# Altium PCB OSU_Robotics_Kids.PcbDoc (part 1 of 3)
Units mm, origin at the board's own origin, x right, y up, seen from the top; angles counter-clockwise.
Board outline 80 x 40 mm, 2 copper layers (Top Layer, Bottom Layer); 19 components, 0 nets, 262 pads, 0 vias.
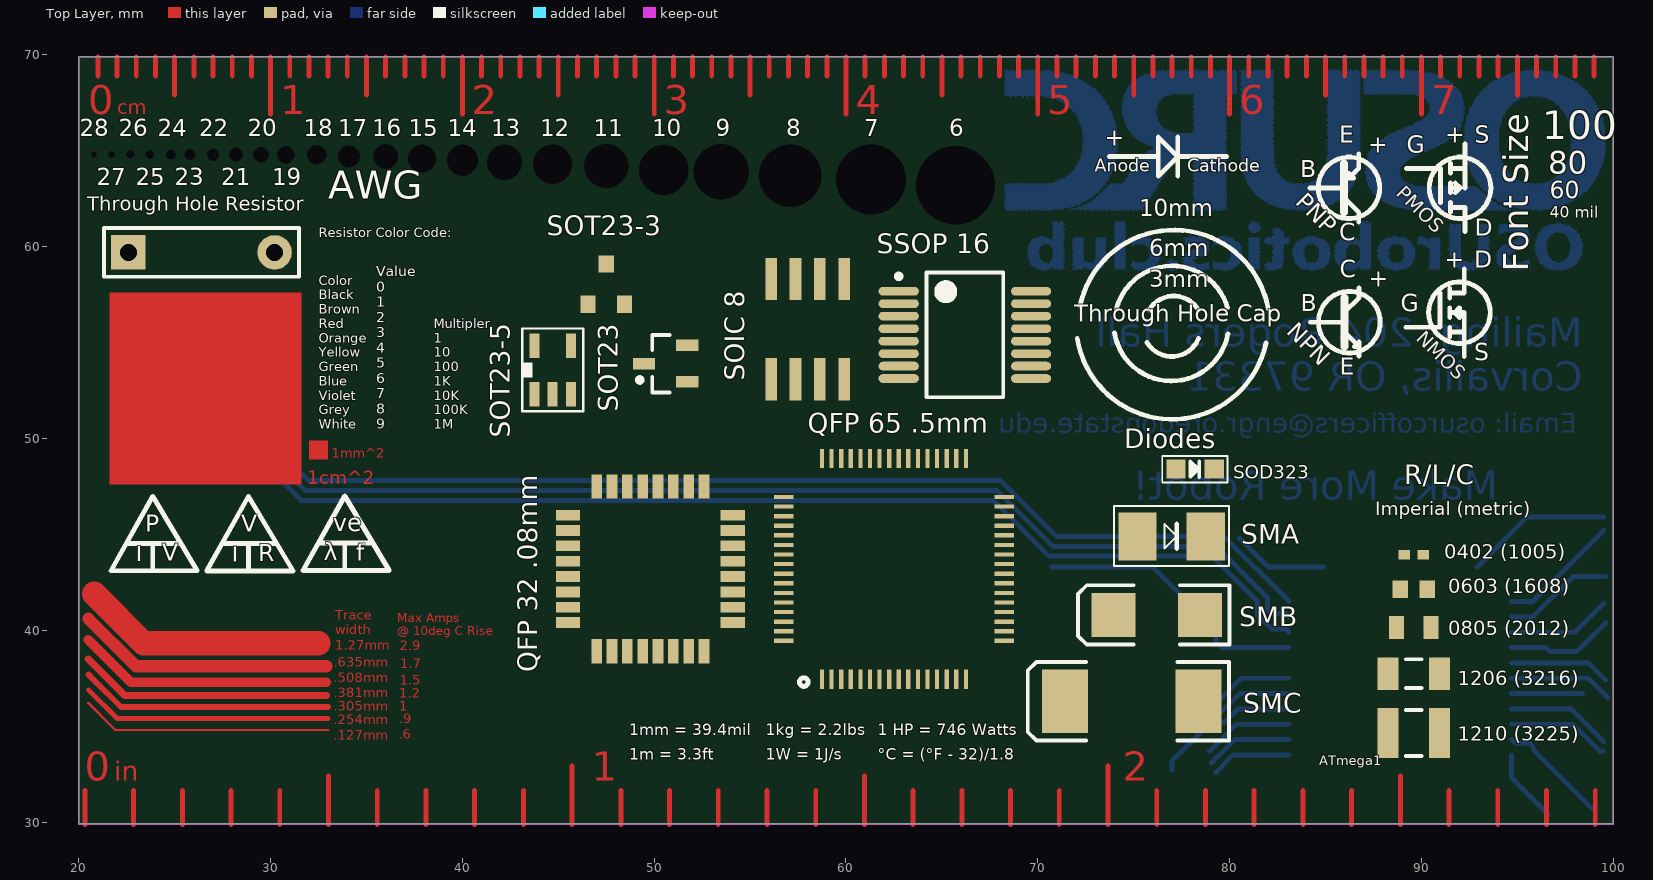
[diagram p0: Top Layer view]
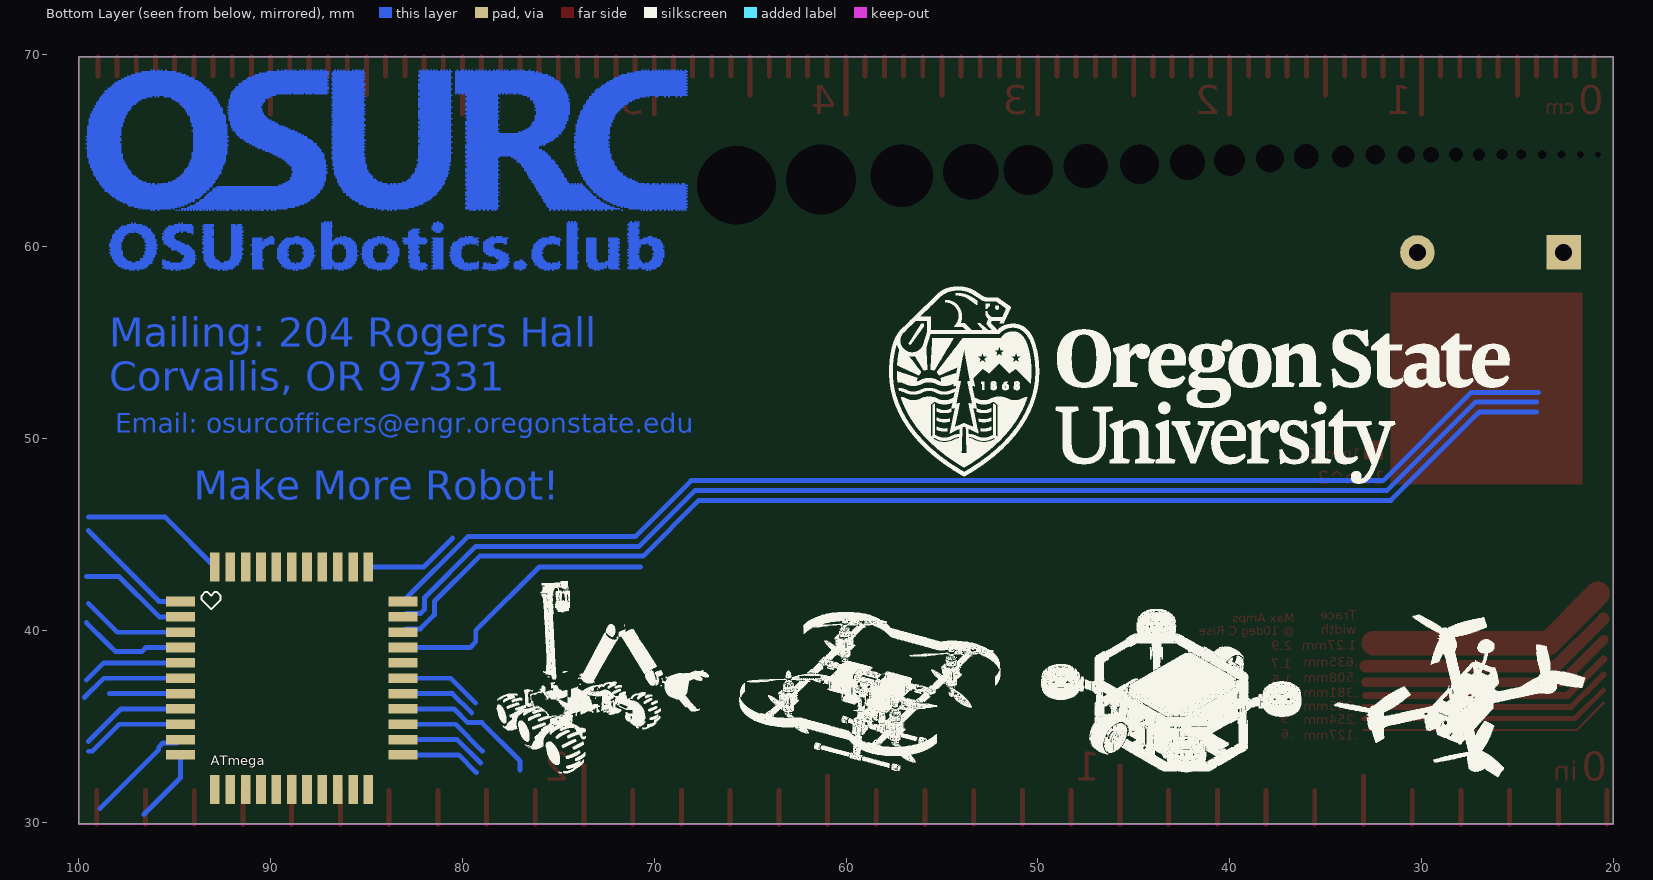
[diagram p1: Bottom Layer view, seen from below]

## Layer stack, top to bottom
Top Solder: solder mask 0.0102, Solder Resist, Dk 3.5
Top Layer: signal copper 0.0356
Dielectric 1: dielectric 0.32, FR-4, Dk 4.8
Bottom Layer: signal copper 0.0356
Bottom Solder: solder mask 0.0102, Solder Resist, Dk 3.5

## Board outline
20,29.9 100,29.9 100,69.9 20,69.9

## Design rules (kind name [scope] priority, off if disabled: settings)
Clearance [All] p1: gap=0.254 ignorepadtopadclearanceinfootprint=FALSE except(0: Arc-Hole Track-Hole SMDPad-Hole THPad-Hole Via-Hole Fill-Hole Poly-Hole Region-Hole Text-Hole)
PolygonConnect [All] p1: connectstyle=Relief reliefconductorwidth=0.254 reliefentries=4 polygonreliefangle="90 Angle" airgapwidth=0.254
RoomDefinition OSU_Robotics_Kids_lights [InComponentClass('OSU_Robotics_Kids_lights')] p1: confinementstyle=ConfineIn formatcopy=TRUE lockcomponents=FALSE outline 20,30 100,30 100,69.9 20,69.9
RoutingVias [All] p1: holewidth=0.711 width=1.27 viastyle="Through Hole" minholewidth=0.711 minwidth=1.27 maxholewidth=0.711 maxwidth=1.27
SolderMaskExpansion [All] p1: expansion=0.102
Width [All] p1: maxlimit=2.54 minlimit=0.076 preferedwidth=0.254
30 further rules are at their usual default settings.

## Classes and differential pairs
component class OSU_Robotics_Kids_lights: "0402 (1005)" "0603 (1608)" "0805 (2012)" "1206 (3216)" "1210 (3225)" ATmega "QFP 32 .08mm" "QFP 65 .5mm" SMA SMB SMC SOD323 "SOIC 8" SOT23 SOT23-3 SOT23-5 "SSOP 16"

## Components (designator, comment, footprint, x,y, rotation, side; value= is the part's Value field where it differs from the comment)
"0402 (1005)" "Cap Semi" 0402 89.6,43.94 r180 top value="0402 (1005)"
"0603 (1608)" "Cap Semi" 1608[0603] 89.6,42.14 r180 top value="0603 (1608)"
"0805 (2012)" "0805 (2012)" 0805 89.6,40.14 r180 top
"1206 (3216)" "Cap Semi" C1206 89.6,37.74 r0 top value="1206 (3216)"
"1210 (3225)" "Cap Semi" C1210 89.6,34.64 r0 top value="1210 (3225)"
ATmega "ATmega" SPARKFUN-DIGITALIC_TQFP44#1 88.9,37.5 r180 bottom
ATmega1 "ATmega" SPARKFUN-DIGITALIC_TQFP44#2 88.9,37.5 r0 top (schematic designator ATmega)
"QFP 32 .08mm" "QFP 32 .08mm" TQFP32-08_MCU 49.8,43.2 r0 top
"QFP 65 .5mm" "QFP 65 .05mm" TQFP64_MCU 62.5,43.2 r0 top
SMA "MBRS140" DIODE-SMA 74.325,44.9 r180 top
SMB "D Schottky" SMB 76.2,40.8 r180 top
SMC "Diode" SMC 74.9,36.3 r180 top
SOD323 "BAT20" SOD323 77.2,48.4 r180 top
"SOIC 8" "SOIC 8" SOIC-8 58,55.7 r0 top
SOT23 "SOT-23" SOT23_N 50.6,53.9 r180 top
SOT23-3 "" SOT23-3 47.5,58 r0 top
SOT23-5 "AD8601" SOT23-5 43.76,52.3 r90 top
"SSOP 16" "SSOP 16" SSOP16_N 66.2,55.4 r0 top value=1K (schematic designator R25)
"Through Hole Resistor" "Comment" PCB-2034311-1 26.4,59.7 r0 top

## Footprints (in the part's own frame and the unit in brackets; to place one, negate y for a bottom-side part, rotate by r counter-clockwise, add the part's x,y. Pads: shape width x height; smd on the part's side, far side on the other; paste and mask are expansions set on the pad)
0402 [mm] "Chip Capacitor, Body 1.0x0.5mm, IPC High Density"
  rect 0.6x0.5 smd: 1(-0.5,0) 2(0.5,0)
  body extent -0.55,-0.3 0.55,0.3, height 1.3
0805 [mil]
  rect 31.5x47.24 smd: 1(-35.43,0) 2(35.43,0)
1608[0603] [mm] "Chip Capacitor, Body 1.6x0.8mm, IPC High Density"
  rect 0.8x0.9 smd: 1(-0.7,0) 2(0.7,0)
  body extent -0.87,-0.48 0.87,0.48, height 1.3
C1206 [mm] "Chip Capacitor, Body 3.2x1.6mm, IPC High Density"
  rect 1.1x1.7 smd: 1(-1.35,0) 2(1.35,0)
  silkscreen extent -0.4,-0.75 0.4,0.75, body extent -1.7,-0.9 1.7,0.9, height 1.3
C1210 [mm] "Chip Capacitor, Body 3.2x2.5mm, IPC High Density"
  rect 1.1x2.6 smd: 1(-1.35,0) 2(1.35,0)
  silkscreen extent -0.4,-1.2 0.4,1.2, body extent -1.7,-1.35 1.7,1.35, height 1.3
DIODE-SMA [mm]
  rect 2x2.5 smd: A(-0.875,0) K(-4.425,0)
  silkscreen extent -5.65,-1.58 0.35,1.55, body extent -5.2,-1.3 0,1.3, height 2.4
PCB-2034311-1 [mm] "8-Pin Plastic Dual In-Line Package (PDIP)"
  rect 1.8x1.8 hole 0.9: 1(-3.81,0)
  round 1.8 hole 0.9: 2(3.81,0)
  silkscreen extent -5.08,-1.27 5.08,1.27, body extent -4.11,-1.2 4.11,1.2, height 2.4
SMB [mm] "DO-214-AA/SMB; 2 C-Bend Leads; Body 5.3 x 3.6 mm, inc. leads (LxW)"
  rect 2.3x2.3 smd: 1(-2.25,0) 2(2.25,0)
  silkscreen extent -3.8,-1.55 4.1,1.55
SMC [mm] "DO-214-AB/SMC; 2 C-Bend Leads; Body 7.9 x 5.9 mm, inc. leads (LxW)"
  rect 2.4x3.3 smd: 1(-3.475,0) 2(3.475,0)
  silkscreen extent -5.07,-2.05 5.43,2.05
SOD323 [mm]
  rect 1x1 smd: A(0,0) K(-2,0)
  silkscreen extent -2.69,-0.69 0.71,0.69, body extent -2.23,-0.65 0.18,0.65, height 0.74
SOIC-8 [mil]
  rect 24x87 smd: 1(-75,-103) 2(-25,-103) 3(25,-103) 4(75,-103) 5(75,103) 6(25,103) 7(-25,103) 8(-75,103)
SOT23-3 [mil]
  rect 31.5x35.43 smd: 1(-37.4,-39.37) 2(37.4,-39.37) 3(0,43.31)
SOT23-5 [mil]
  rect 50x20 smd: 1(0,0) 2(0,-37) 3(0,-75) 4(100,-75) 5(100,0)
  silkscreen extent -35,-100 135,25, body extent 2,-95 98,20, height 52
SOT23_N [mm] "SOT23, 3-Leads, Body 2.9x1.3mm, Pitch 0.95mm, Lead Span 2.3mm - Reverse Pinning, IPC Medium Density"
  rect 1.15x0.6 smd: 1(1.125,0) 2(-1.125,-0.95) 3(-1.125,0.95)
  silkscreen extent -0.2,-1.5 1.47,1.5, body extent -0.7,-1.5 0.7,1.5, height 1.1
SPARKFUN-DIGITALIC_TQFP44#1 [mm]
  rect 1.5x0.5 smd: 1(-5.8,4) 2(-5.8,3.2) 3(-5.8,2.4) 4(-5.8,1.6) 5(-5.8,0.8) 6(-5.8,0) 7(-5.8,-0.8) 8(-5.8,-1.6) 9(-5.8,-2.4) 10(-5.8,-3.2) 11(-5.8,-4) 23(5.8,-4) 24(5.8,-3.2) 25(5.8,-2.4) 26(5.8,-1.6) 27(5.8,-0.8) 28(5.8,0) 29(5.8,0.8) 30(5.8,1.6) 31(5.8,2.4) 32(5.8,3.2) 33(5.8,4)
  rect 0.5x1.5 smd: 12(-4,-5.8) 13(-3.2,-5.8) 14(-2.4,-5.8) 15(-1.6,-5.8) 16(-0.8,-5.8) 17(0,-5.8) 18(0.8,-5.8) 19(1.6,-5.8) 20(2.4,-5.8) 21(3.2,-5.8) 22(4,-5.8) 34(4,5.8) 35(3.2,5.8) 36(2.4,5.8) 37(1.6,5.8) 38(0.8,5.8) 39(0,5.8) 40(-0.8,5.8) 41(-1.6,5.8) 42(-2.4,5.8) 43(-3.2,5.8) 44(-4,5.8)
SPARKFUN-DIGITALIC_TQFP44#2 [mm]
  rect 1.5x0.5 on Bottom Solder: 1(-5.8,4) 2(-5.8,3.2) 3(-5.8,2.4) 4(-5.8,1.6) 5(-5.8,0.8) 6(-5.8,0) 7(-5.8,-0.8) 8(-5.8,-1.6) 9(-5.8,-2.4) 10(-5.8,-3.2) 11(-5.8,-4) 23(5.8,-4) 24(5.8,-3.2) 25(5.8,-2.4) 26(5.8,-1.6) 27(5.8,-0.8) 28(5.8,0) 29(5.8,0.8) 30(5.8,1.6) 31(5.8,2.4) 32(5.8,3.2) 33(5.8,4)
  rect 0.5x1.5 on Bottom Solder: 12(-4,-5.8) 13(-3.2,-5.8) 14(-2.4,-5.8) 15(-1.6,-5.8) 16(-0.8,-5.8) 17(0,-5.8) 18(0.8,-5.8) 19(1.6,-5.8) 20(2.4,-5.8) 21(3.2,-5.8) 22(4,-5.8) 34(4,5.8) 35(3.2,5.8) 36(2.4,5.8) 37(1.6,5.8) 38(0.8,5.8) 39(0,5.8) 40(-0.8,5.8) 41(-1.6,5.8) 42(-2.4,5.8) 43(-3.2,5.8) 44(-4,5.8)
SSOP16_N [mm] "SOP, 16-Leads, Body 6.2x5.3mm, Pitch 0.65mm, IPC Medium Density"
  oval 2.1x0.45 smd: 1(-3.45,2.275) 2(-3.45,1.625) 3(-3.45,0.975) 4(-3.45,0.325) 5(-3.45,-0.325) 6(-3.45,-0.975) 7(-3.45,-1.625) 8(-3.45,-2.275) 9(3.45,-2.275) 10(3.45,-1.625) 11(3.45,-0.975) 12(3.45,-0.325) 13(3.45,0.325) 14(3.45,0.975) 15(3.45,1.625) 16(3.45,2.275)
  silkscreen extent -3.57,-3.25 2,3.25, body extent -2.7,-3.25 2.7,3.25, height 2
TQFP32-08_MCU [mil]
  rect 50x22 smd: 1(-169,110.24) 2(-169,78.74) 3(-169,47.24) 4(-169,15.75) 5(-169,-15.75) 6(-169,-47.24) 7(-169,-78.74) 8(-169,-110.24) 17(169,-110.24) 18(169,-78.74) 19(169,-47.24) 20(169,-15.75) 21(169,15.75) 22(169,47.24) 23(169,78.74) 24(169,110.24)
  rect 22x50 smd: 9(-110.24,-169) 10(-78.74,-169) 11(-47.24,-169) 12(-15.75,-169) 13(15.75,-169) 14(47.24,-169) 15(78.74,-169) 16(110.24,-169) 25(110.24,169) 26(78.74,169) 27(47.24,169) 28(15.75,169) 29(-15.75,169) 30(-47.24,169) 31(-78.74,169) 32(-110.24,169)
TQFP64_MCU [mm]
  rect 0.22x1 smd: 1(-3.75,-5.75) 2(-3.25,-5.75) 3(-2.75,-5.75) 4(-2.25,-5.75) 5(-1.75,-5.75) 6(-1.25,-5.75) 7(-0.75,-5.75) 8(-0.25,-5.75) 9(0.25,-5.75) 10(0.75,-5.75) 11(1.25,-5.75) 12(1.75,-5.75) 13(2.25,-5.75) 14(2.75,-5.75) 15(3.25,-5.75) 16(3.75,-5.75) 33(3.75,5.75) 34(3.25,5.75) 35(2.75,5.75) 36(2.25,5.75) 37(1.75,5.75) 38(1.25,5.75) 39(0.75,5.75) 40(0.25,5.75) 41(-0.25,5.75) 42(-0.75,5.75) 43(-1.25,5.75) 44(-1.75,5.75) 45(-2.25,5.75) 46(-2.75,5.75) 47(-3.25,5.75) 48(-3.75,5.75)
  rect 1x0.22 smd: 17(5.75,-3.75) 18(5.75,-3.25) 19(5.75,-2.75) 20(5.75,-2.25) 21(5.75,-1.75) 22(5.75,-1.25) 23(5.75,-0.75) 24(5.75,-0.25) 25(5.75,0.25) 26(5.75,0.75) 27(5.75,1.25) 28(5.75,1.75) 29(5.75,2.25) 30(5.75,2.75) 31(5.75,3.25) 32(5.75,3.75) 49(-5.75,3.75) 50(-5.75,3.25) 51(-5.75,2.75) 52(-5.75,2.25) 53(-5.75,1.75) 54(-5.75,1.25) 55(-5.75,0.75) 56(-5.75,0.25) 57(-5.75,-0.25) 58(-5.75,-0.75) 59(-5.75,-1.25) 60(-5.75,-1.75) 61(-5.75,-2.25) 62(-5.75,-2.75) 63(-5.75,-3.25) 64(-5.75,-3.75)

## Part data
"0402 (1005)" "0603 (1608)" "1206 (3216)" "1210 (3225)": "Capacitor (Semiconductor SIM Model)", LatestRevisionDate=29-May-2009, LatestRevisionNote="IPC-7351 Footprint Added.", PackageDescription="Chip Capacitor", PackageReference=C1206, Published=8-Jun-2000, Publisher="Altium Limited"
"0805 (2012)": library part 10UF-0805-10V-10%, PROD_ID=CAP-11330
ATmega ATmega1: library part ATMEGA32U4TQFP, PROD_ID=IC-11161
"QFP 32 .08mm": library part ATMEGA8U2AU, PROD_ID=IC-10104
"QFP 65 .5mm": library part DSPIC30F6015SMD
SMA: "DIODE", Supplier Part Number 1=MBRS140FSTR-ND, Supplier 1=Digi-Key
SMB: "Schottky Diode", Code_JEDEC=DO-214-AA, LatestRevisionDate=17-Jul-2002, LatestRevisionNote="Re-released for DXP Platform.", PackageDescription="DO-214-AA/SMB; 2 C-Bend Leads; Body 5.3 x 3.6 mm, inc. leads (LxW)", PackageReference=SMB, Published=8-Jun-2000, Publisher="Altium Limited"
SMC: "Default Diode", Code_JEDEC=DO-214-AB, LatestRevisionDate=17-Jul-2002, LatestRevisionNote="Re-released for DXP Platform.", PackageDescription="DO-214-AB/SMC; 2 C-Bend Leads; Body 7.9 x 5.9 mm, inc. leads (LxW)", PackageReference=SMC, PackageVersion=Sep-1996, Published=8-Jun-2000, Publisher="Altium Limited"
SOD323: library part BAT20-SOD323, "Schottky Diode SOD323 1A 23V", Supplier Part Number 1=497-3381-2-ND, Supplier 1=Digi-Key
"SOIC 8": library part LM34DM, PROD_ID=IC-08232
SOT23: library part "Diode BBY31", "SOT23 Silicon Planar Variable Capacitance Diode", ComponentLink1Description="Manufacturer Link", ComponentLink1URL=http://www.zetex.com/, ComponentLink2Description=Datasheet, ComponentLink2URL=www.zetex.com/3.0/pdf/BBY31.pdf, DatasheetVersion=Jan-1998, LatestRevisionDate=29-May-2009, LatestRevisionNote="IPC-7351 Footprint Added.", Note="Pin 2 is not connected and not drawn.", PackageDescription="3-Pin SOT-23 Package 0.95 mm Pitch, 2.3 mm Lead Span - Reverse Pinning", PackageReference=SOT23, PackageVersion=1996, Published=8-Jun-2000, Publisher="Altium Limited"
SOT23-3: library part ATSHA204-TSU, PROD_ID=IC-11208
SOT23-5: "RAIL TO RAIL OPAMP", Current - Input Bias=0.2pA, Current - Output / Channel=50mA, Current - Supply=750µA, Manufacturer="Analog Devices Inc", Manufacturer Part Number=AD8601WDRTZ-REEL7, Operating Temperature="-40°C ~ 125°C", Package / Case="SOT-23-5, SC-74A, SOT-25", Supplier Part Number=AD8601WDRTZ-REEL7CT-ND, Voltage - Input Offset=1300µV, Voltage - Supply, Single/Dual (±)="2.7 V ~ 5.5 V", Amplifier Type="General Purpose", Category="Integrated Circuits (ICs)", Gain Bandwidth Product=8.4MHz, Number of Circuits=1, Output Type=Rail-to-Rail, Packaging="Cut Tape (CT)", RoHS="RoHS Compliant", Slew Rate="6 V/µs", Supplier=Digi-Key, Supplier 1=Digi-Key, Supplier Part Number 1=AD8601WDRTZ-REEL7CT-ND, Text Field1=ST, Text Field2=LM2903DT, Text Field3=Avnet, Text Field4=LM2903DT, Text Field5=SO8, Text Field6=0.078
"SSOP 16": library part "Res Pack4", "Isolated Resistor Network", Code_IPC=SOP65P780-16, Code_JEDEC=MO-150-AC, LatestRevisionDate=29-May-2009, LatestRevisionNote="IPC-7351 Footprint Added.", PackageDescription="16-Pin Plastic Small Outline Package 0.65 mm Pitch", PackageReference=SSOP16, PackageVersion=Oct-2003, Published=24-Mar-1999, Publisher="Altium Limited"

## Free pads (board coordinates)
  round 0 hole 0.32: 2(20.8,64.8)
  round 0 hole 0.361: 2(21.7,64.8)
  round 0 hole 0.404: 2(22.7,64.8)
  round 0 hole 0.455: 2(23.7,64.8)
  round 0 hole 0.511: 2(24.8,64.8)
  round 0 hole 0.574: 2(25.8,64.8)
  round 0 hole 0.646: 2(27,64.8)
  round 0 hole 0.724: 2(28.2,64.8)
  round 0 hole 0.813: 2(29.5,64.8)
  round 0 hole 0.912: 2(30.8,64.8)
  round 0 hole 1.024: 2(32.4,64.8)
  round 0 hole 1.151: 2(34.1,64.7)
  round 0 hole 1.29: 2(36,64.7)
  round 0 hole 1.45: 2(37.9,64.6)
  round 0 hole 1.628: 2(40,64.5)
  round 0 hole 1.829: 2(42.2,64.4)
  round 0 hole 2.052: 2(44.7,64.3)
  round 0 hole 2.304: 2(47.5,64.2)
  round 0 hole 2.588: 2(50.5,64)
  round 0 hole 2.906: 2(53.5,63.9)
  round 0 hole 3.264: 2(57.1,63.7)
  round 0 hole 3.665: 2(61.3,63.5)
  round 0 hole 4.115: 2(65.7,63.2)

## Nets (pads, with @x,y where several pads share a name; then routed paths per layer and width w, separated by ;. In a path a pad name is that pad's centre, name@x,y a point inside that pad or via, vN(x,y) a via of type N, cw(c..) or ccw(c..) an arc to the next point about the centre after c; other vN are vias at no path point)
pads on no net: "0402 (1005).1" "0402 (1005).2" "0603 (1608).1" "0603 (1608).2" "0805 (2012).1" "0805 (2012).2" "1206 (3216).1" "1206 (3216).2" "1210 (3225).1" "1210 (3225).2" "QFP 32 .08mm.1" "QFP 32 .08mm.2" "QFP 32 .08mm.3" "QFP 32 .08mm.4" "QFP 32 .08mm.5" "QFP 32 .08mm.6" "QFP 32 .08mm.7" "QFP 32 .08mm.8" "QFP 32 .08mm.9" "QFP 32 .08mm.10" "QFP 32 .08mm.11" "QFP 32 .08mm.12" "QFP 32 .08mm.13" "QFP 32 .08mm.14" "QFP 32 .08mm.15" "QFP 32 .08mm.16" "QFP 32 .08mm.17" "QFP 32 .08mm.18" "QFP 32 .08mm.19" "QFP 32 .08mm.20" "QFP 32 .08mm.21" "QFP 32 .08mm.22" "QFP 32 .08mm.23" "QFP 32 .08mm.24" "QFP 32 .08mm.25" "QFP 32 .08mm.26" "QFP 32 .08mm.27" "QFP 32 .08mm.28" "QFP 32 .08mm.29" "QFP 32 .08mm.30" "QFP 32 .08mm.31" "QFP 32 .08mm.32" "QFP 65 .5mm.1" "QFP 65 .5mm.2" "QFP 65 .5mm.3" "QFP 65 .5mm.4" "QFP 65 .5mm.5" "QFP 65 .5mm.6" "QFP 65 .5mm.7" "QFP 65 .5mm.8" "QFP 65 .5mm.9" "QFP 65 .5mm.10" "QFP 65 .5mm.11" "QFP 65 .5mm.12" "QFP 65 .5mm.13" "QFP 65 .5mm.14" "QFP 65 .5mm.15" "QFP 65 .5mm.16" "QFP 65 .5mm.17" "QFP 65 .5mm.18" "QFP 65 .5mm.19" "QFP 65 .5mm.20" "QFP 65 .5mm.21" "QFP 65 .5mm.22" "QFP 65 .5mm.23" "QFP 65 .5mm.24" "QFP 65 .5mm.25" "QFP 65 .5mm.26" "QFP 65 .5mm.27" "QFP 65 .5mm.28" "QFP 65 .5mm.29" "QFP 65 .5mm.30" "QFP 65 .5mm.31" "QFP 65 .5mm.32" "QFP 65 .5mm.33" "QFP 65 .5mm.34" "QFP 65 .5mm.35" "QFP 65 .5mm.36" "QFP 65 .5mm.37" "QFP 65 .5mm.38" "QFP 65 .5mm.39" "QFP 65 .5mm.40" "QFP 65 .5mm.41" "QFP 65 .5mm.42" "QFP 65 .5mm.43" "QFP 65 .5mm.44" "QFP 65 .5mm.45" "QFP 65 .5mm.46" "QFP 65 .5mm.47" "QFP 65 .5mm.48" "QFP 65 .5mm.49" "QFP 65 .5mm.50" "QFP 65 .5mm.51" "QFP 65 .5mm.52" "QFP 65 .5mm.53" "QFP 65 .5mm.54" "QFP 65 .5mm.55" "QFP 65 .5mm.56" "QFP 65 .5mm.57" "QFP 65 .5mm.58" "QFP 65 .5mm.59" "QFP 65 .5mm.60" "QFP 65 .5mm.61" "QFP 65 .5mm.62" "QFP 65 .5mm.63" "QFP 65 .5mm.64" "SOIC 8.1" "SOIC 8.2" "SOIC 8.3" "SOIC 8.4" "SOIC 8.5" "SOIC 8.6" "SOIC 8.7" "SOIC 8.8" "SSOP 16.1" "SSOP 16.2" "SSOP 16.3" "SSOP 16.4" "SSOP 16.5" "SSOP 16.6" "SSOP 16.7" "SSOP 16.8" "SSOP 16.9" "SSOP 16.10" "SSOP 16.11" "SSOP 16.12" "SSOP 16.13" "SSOP 16.14" "SSOP 16.15" "SSOP 16.16" "Through Hole Resistor.1" "Through Hole Resistor.2" ATmega1.1 ATmega1.2 ATmega1.3 ATmega1.4 ATmega1.5 ATmega1.6 ATmega1.7 ATmega1.8 ATmega1.9 ATmega1.10 ATmega1.11 ATmega1.12 ATmega1.13 ATmega1.14 ATmega1.15 ATmega1.16 ATmega1.17 ATmega1.18 ATmega1.19 ATmega1.20 ATmega1.21 ATmega1.22 ATmega1.23 ATmega1.24 ATmega1.25 ATmega1.26 ATmega1.27 ATmega1.28 ATmega1.29 ATmega1.30 ATmega1.31 ATmega1.32 ATmega1.33 ATmega1.34 ATmega1.35 ATmega1.36 ATmega1.37 ATmega1.38 ATmega1.39 ATmega1.40 ATmega1.41 ATmega1.42 ATmega1.43 ATmega1.44 ATmega.1 ATmega.2 ATmega.3 ATmega.4 ATmega.5 ATmega.6 ATmega.7 ATmega.8 ATmega.9 ATmega.10 ATmega.11 ATmega.12 ATmega.13 ATmega.14 ATmega.15 ATmega.16 ATmega.17 ATmega.18 ATmega.19 ATmega.20 ATmega.21 ATmega.22 ATmega.23 ATmega.24 ATmega.25 ATmega.26 ATmega.27 ATmega.28 ATmega.29 ATmega.30 ATmega.31 ATmega.32 ATmega.33 ATmega.34 ATmega.35 ATmega.36 ATmega.37 ATmega.38 ATmega.39 ATmega.40 ATmega.41 ATmega.42 ATmega.43 ATmega.44 SMA.A SMA.K SMB.1 SMB.2 SMC.1 SMC.2 SOD323.A SOD323.K SOT23-3.1 SOT23-3.2 SOT23-3.3 SOT23-5.1 SOT23-5.2 SOT23-5.3 SOT23-5.4 SOT23-5.5 SOT23.1 SOT23.2 SOT23.3